# Altium PCB Mixed Signal Board Project.PcbDoc (part 2 of 3)
Units mm, origin at the board's own origin, x right, y up, seen from the top; angles counter-clockwise.
Board outline 70.1 x 70.99 mm, 4 copper layers (Top Layer, GND, VCC, Bottom Layer), stack 1.565 mm thick; 188 components, 143 nets, 738 pads, 458 vias.
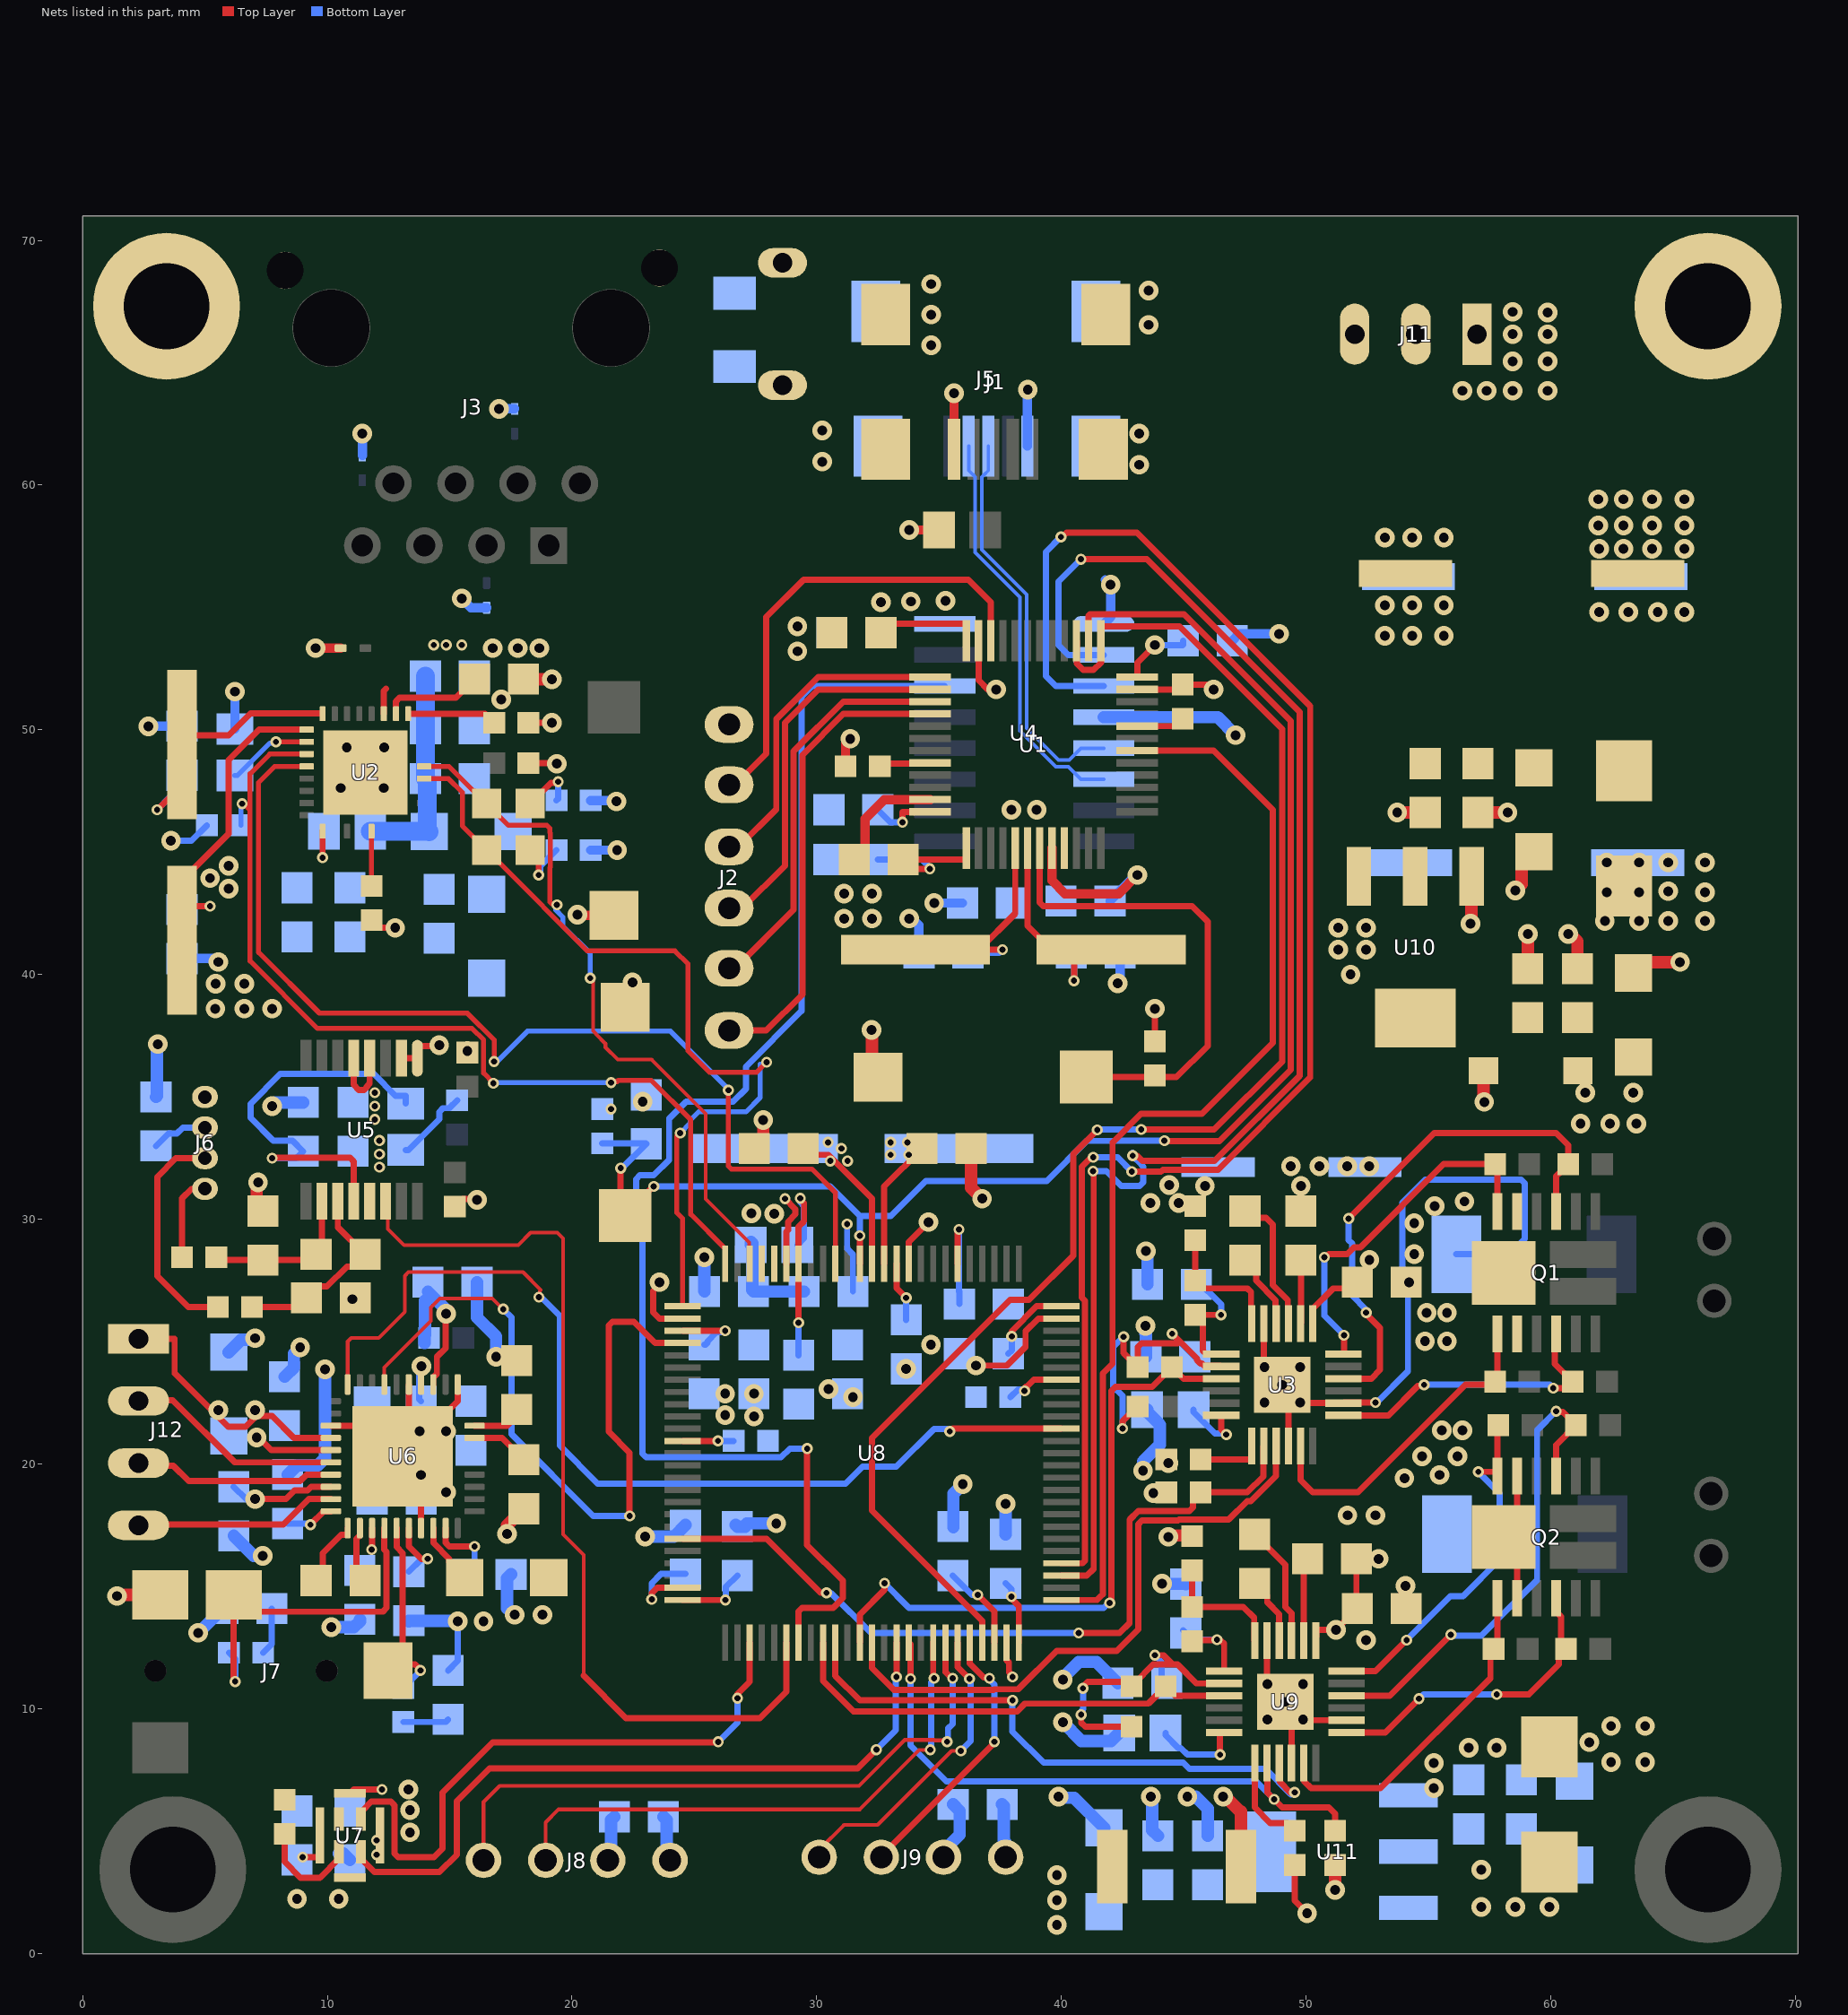
[diagram p4: the nets of this part, all layers, seen from the top]

## Via types
v1: diameter 0.8, hole 0.4, Top Layer to Bottom Layer, tented both sides, 280 vias
v2: diameter 0.45, hole 0.25, Top Layer to Bottom Layer, tented both sides, 178 vias

## Nets (pads, with @x,y where several pads share a name; then routed paths per layer and width w, separated by ;. In a path a pad name is that pad's centre, name@x,y a point inside that pad or via, vN(x,y) a via of type N, cw(c..) or ccw(c..) an arc to the next point about the centre after c; other vN are vias at no path point)
+1V8: C37.2 C38.2 C87.2 C88.2 C89.2 D8.K FB3.1 U6.34 U11.2 U11.4 | length 2.3
  Top Layer w0.254: U6.34@13.831,23.255 13.831,23.991 v1(13.843,24.003)
  Bottom Layer w0.254: C37.2@13.831,22.57 13.758,22.643 13.758,23.918 v1(13.843,24.003)
  other v1: 39.814,1.168 39.814,2.175 39.814,3.212
+3V3: C1.2 C2.2 C3.2 C4.2 C7.2 C8.2 C9.2 C16.2 C17.2 C18.2 C19.2 C28.2 C29.2 C31.2 C44.2 C45.2 C46.2 C47.2 C52.2 C53.2 C54.2 C55.2 C59.2 C60.2 C61.2 C62.2 C63.2 C64.2 C71.2 C78.2 C79.2 C83.2 D6.K FB1.1 FB2.1 FB4.1 J6.3 J8.3 J9.3 R2.2 R3.2 R5.2 R8.2 R9.2 R10.1 R21.1 R25.2 R26.2 R27.2 R32.2 R33.2 R35.2 R45.1 U1.1 U1.9 U1.24 U1.36 U1.48 U2.17 U4.4 U4.16 U5.13 U6.5 U6.8 U6.33 U7.1 U8.6 U8.11 U8.19 U8.28 U8.50 U8.75 U8.100 U10.2 U10.4 | length 88.2
  Top Layer w0.254: v1(7.048,18.57) 8.31,18.57 8.664,18.924 9.186,18.924 9.332,19.07 U6.8@10.146,19.07 ; v1(7.112,21.082) 7.193,21.082 7.704,20.57 U6.5@10.146,20.57 ; v2(9.804,44.78) 9.807,44.783 U2.17@9.807,45.86 ; R8.2@11.811,42.227 12.128,41.91 v1(12.774,41.91) v1@12.807,41.877 ; U6.33@14.331,23.255 14.331,23.546 14.477,23.692 14.477,24.384 14.831,24.738 14.831,26.116 v1@15.061,26.346 ; R25.2@15.215,30.518 15.529,30.832 16.08,30.832 v1(16.115,30.797) ; R5.2@18.218,48.641 19.355,48.641 v1(19.38,48.616) ; R9.2@18.218,50.292 v1(19.177,50.292) ; U8.50@24.52,14.447 v2(26.267,14.447) ; U8.28@24.52,25.447 v2(26.258,25.447) ; v2(29.258,25.781) 29.258,29.701 29.483,29.927 29.483,30.652 29.33,30.806 v2(29.33,30.859) ; C4.2@32.623,53.975 32.989,54.341 36.089,54.341 36.112,54.318 U1.36@36.112,53.641 ; U8.11@33.258,28.185 33.258,27.194 v2(33.655,26.797) ; v2(33.506,46.228) 33.506,46.637 33.514,46.645 34.616,46.645 U1.48@34.624,46.653 ; v2(34.624,44.323) 33.909,44.323 C3.2@33.528,44.704 36.089,44.704 36.112,44.727 U1.1@36.112,45.165 ; U8.6@35.758,28.185 35.758,29.483 35.813,29.538 v2(35.813,29.591) ; v2(37.953,14.587) 37.953,14.506 38.258,14.202 U8.75@38.258,12.709 ; v2(37.968,25.216) 37.968,25.426 38.989,26.447 U8.100@39.996,26.447 ; U1.24@43.1,52.153 43.1,52.752 v1(43.815,53.467) ; R2.2@43.815,37.275 v1(43.815,38.608) ; R45.1@49.53,3.62 49.53,2.159 v1(50.038,1.651)
  Top Layer w0.381: v1(33.782,58.166) R3.2@34.991,58.166
  Bottom Layer w0.254: C31.2@3,33 3.508,33.508 3.852,33.508 4.094,33.75 J6.3@5,33.75 ; v1(3.612,45.466) 4.445,45.466 R10.1@5.08,46.101 ; C44.2@6.177,19.07 6.677,18.57 v1(7.048,18.57) ; FB2.1@13.208,32.832 13.308,32.832 14.572,34.096 14.572,34.395 14.721,34.544 14.986,34.544 R26.2@15.304,34.862 ; C62.2@25.4,24.876 25.456,24.876 25.527,24.947 25.527,25.003 25.908,25.384 25.964,25.384 25.98,25.4 26.211,25.4 v2(26.258,25.447) ; v2(26.267,14.447) 26.293,14.473 26.293,14.982 C61.2@26.758,15.447 ; FB4.1@29.208,28.956 29.48,29.228 29.48,30.548 29.33,30.698 v2(29.33,30.859) ; C63.2@29.258,24.447 29.258,25.447 v2(29.258,25.781) ; C2.2@32.496,44.704 34.29,44.704 34.624,44.37 v2(34.624,44.323) ; C1.2@32.496,46.736 33.004,46.228 v2(33.506,46.228) ; C28.2@32.623,53.975 32.979,54.331 U4.16@35.231,54.331 ; C64.2@33.655,25.892 v2(33.655,26.797) ; v2(35.813,29.591) 35.813,27.051 35.83,27.051 C71.2@35.83,26.543 ; C60.2@37.719,15.129 37.953,14.894 v2(37.953,14.587) ; C59.2@37.83,24.511 37.968,24.649 v2(37.968,25.216) ; v1(43.815,53.467) 44.958,53.467 44.974,53.483 C9.2@44.974,53.641
  Bottom Layer w0.508: R32.2@13.97,24.956 13.97,25.257 13.986,25.273 13.986,26.67 ; C47.2@14.11,27.051 14.859,26.302 v1(14.859,26.144) ; J8.3@21.463,3.81 21.598,3.945 21.598,5.453 C54.2@21.733,5.588 ; J9.3@35.179,3.937 35.179,4.192 35.839,4.852 35.839,5.833 C55.2@35.576,6.096 ; U4.4@41.731,50.521 46.38,50.521 v1(47.117,49.784)
  other v1: 13.379,4.953 13.379,5.867 13.31,6.706 44.369,20.041 5.542,22.205 7.048,22.205 61.214,33.909 62.42,33.909 63.5,33.909 61.404,35.179 63.368,35.179 15.723,36.881 5.969,43.511 5.207,43.942 5.969,44.45 37.957,46.736 38.989,46.736 32.623,55.217 33.846,55.245 35.259,55.275
  other v2: 12.128,32.131 12.128,32.667 12.128,33.22 21.596,34.506
+12V: C23.2 C24.1 C25.2 C73.2 C75.2 C80.1 C81.1 C82.1 D5.A D7.A J11.1 Q1.2 Q1.11 Q1.15 Q2.2 Q2.11 Q2.15 U3.1 U9.1 | length 14
  Top Layer w0.254: U3.1@50.272,25.741 50.272,26.341 51.109,27.178 51.832,27.178 52.584,27.93 v1(52.584,28.344) ; U9.1@50.399,12.787 50.399,12.934 50.419,12.954 50.419,13.227 50.422,13.23 v1(51.219,13.23) C75.2@52.086,14.097 52.054,14.129 C73.2@52.054,16.129 ; Q2.2@58.617,14.518 58.617,16.468 Q2.15@58.067,17.018 58.617,17.568 Q2.11@58.617,19.518
  other v1: 62.46,7.823 63.85,7.823 61.571,8.636 62.46,9.296 63.85,9.296 52.451,12.81 52.958,16.129 51.689,17.907 52.832,17.907 54.856,25.019 55.753,25.019 54.927,26.187 55.753,26.187 49.784,31.369 49.376,32.172 50.546,32.172 51.673,32.172 52.578,32.172 62.205,42.189 63.602,42.189 64.795,42.189 66.294,42.189 63.602,43.358 62.281,43.37 66.294,43.37 64.795,43.409 62.281,44.582 63.602,44.582 64.795,44.582 66.294,44.582 61.976,54.813 63.17,54.813 64.364,54.813 65.456,54.813 61.976,57.404 62.97,57.404 64.135,57.404 65.456,57.404 61.933,58.349 62.97,58.349 64.135,58.349 65.456,58.349 61.933,59.421 62.97,59.421 64.135,59.421 65.456,59.421 56.383,63.856 57.379,63.856 58.433,63.856 59.868,63.856 58.433,65.062 59.868,65.062 58.433,66.167 59.868,66.167 59.868,67.056 58.433,67.081
AIN0: J6.2 R28.2 | length 9.3
  Top Layer w0.254: J6.2@5,32.5 3.81,32.5 3.048,31.738 3.048,27.686 4.318,26.416 R28.2@5.524,26.416
AIN1: J6.1 R29.2 | length 3.5
  Top Layer w0.254: R29.2@4.064,28.448 4.064,30.861 4.445,31.242 4.992,31.242 J6.1@5,31.25
CAN_RX: J9.1 U8.70 | length 12.6
  Top Layer w0.152: J9.1@30.099,3.937 30.099,4.242 31.115,5.258 32.487,5.258 35.509,8.28 v2(35.89,8.28)
  Top Layer w0.254: U8.70@35.758,12.709 35.758,11.712 v2(36.24,11.231)
  Bottom Layer w0.254: v2(35.89,8.28) 36.296,8.686 36.296,11.175 v2(36.24,11.231)
CAN_TX: J9.2 U8.71 | length 11.2
  Top Layer w0.254: J9.2@32.639,3.937 32.639,3.986 37.258,8.605 v2(37.258,8.655) ; U8.71@36.258,12.709 36.258,11.854 36.824,11.288 37.021,11.288 v2(37.059,11.251)
  Bottom Layer w0.254: v2(37.059,11.251) 37.059,11.198 37.258,10.998 v2(37.258,8.655)
CH340_RST: U4.14 U8.57 | length 58.3
  Top Layer w0.254: U8.57@29.258,12.709 29.258,13.981 29.407,14.13 30.672,14.13 31.063,14.521 31.063,15.241 29.607,16.697 v2(29.607,20.634)
  Bottom Layer w0.254: v2@29.566,20.599 29.531,20.634 28.903,20.634 28.543,20.274 26.067,20.274 26.064,20.277 23.034,20.277 22.885,20.426 22.885,29.843 22.62,30.109 22.62,31.643 22.775,31.797 23.341,31.797 23.968,32.424 23.968,34.119 24.663,34.814 26.585,34.814 27.102,35.331 27.102,36.246 29.362,38.506 29.378,38.506 29.378,51.349 29.82,51.791 U4.14@35.231,51.791
CH340_RXD: U4.3 U8.79 | length 65.3
  Top Layer w0.254: v2(39.98,57.887) 40.033,57.887 40.209,58.063 43.079,58.063 46.179,54.962 50.165,50.976 50.165,35.794 46.401,32.029 44.141,32.029 44.065,31.953 v2(42.875,31.953) ; U8.79@39.996,15.947 40.857,15.947 40.962,16.052 40.962,26.669 40.835,26.795 40.835,32.158 41.215,32.537 v2(41.3,32.537)
  Bottom Layer w0.254: v2(39.98,57.887) 39.37,57.277 39.37,52.194 39.773,51.791 U4.3@41.731,51.791 ; v2(41.3,32.537) 42.291,32.537 v2(42.875,31.953)
CH340_TXDPort: U4.2 U8.78 | length 62.7
  Top Layer w0.254: U8.78@39.996,15.447 41.04,15.447 41.318,15.725 41.318,31.941 v2(41.289,31.97) ; v2(40.799,56.972) 43.485,56.972 49.73,50.727 49.73,35.862 46.253,32.385 43.299,32.385 43.082,32.602 v2(42.912,32.602)
  Bottom Layer w0.254: v2(40.799,56.972) 39.886,56.059 39.886,53.46 40.284,53.061 U4.2@41.731,53.061 ; v2(41.289,31.97) 41.842,31.97 42.443,31.369 43.191,31.369 43.339,31.518 43.339,32.156 43.272,32.223 43.272,32.242 v2(42.912,32.602) 43.029,32.602 43.195,32.436 v2@42.903,32.728
CH340USB_D_N: J5.2 U4.6 | length 16.7
  Bottom Layer w0.146: J5.2@36.212,61.595 36.212,60.595 J5.2@36.389,60.418 ; J5.2@36.39,60.418 36.476,60.332 36.476,57.246 38.305,55.416 38.305,49.963 39.773,48.495 40.284,48.495 40.799,47.981 U4.6@41.731,47.981
CH340USB_D_P: J5.3 U4.5 | length 16.3
  Bottom Layer w0.146: J5.3@36.834,60.418 36.748,60.332 36.748,57.359 38.578,55.529 38.578,50.076 39.886,48.768 40.315,48.768 40.799,49.251 U4.5@41.731,49.251 ; J5.3@36.835,60.418 37.012,60.595 J5.3@37.012,61.595
CLK_MIC: U7.3 U8.65 | length 29.6
  Top Layer w0.254: U7.3@11.372,4.151 11.372,3.876 11.921,3.327 14.58,3.327 15.291,4.039 15.291,6.223 16.637,7.569 31.674,7.569 v2(32.436,8.331) ; v2(33.258,11.305) U8.65@33.258,12.709
  Bottom Layer w0.254: v2(32.436,8.331) 33.236,9.132 33.236,11.283 v2(33.258,11.305)
COL: DS1.A U2.28 U8.26 | length 34.9
  Top Layer w0.203: U2.28@13.957,48.01 14.952,48.01 15.519,47.443 15.519,46.076 17.008,44.587 20.623,40.972 24.203,40.972 24.74,40.435 24.74,36.882 25.611,36.01 27.544,36.01 v2(27.955,36.421) ; v2(24.422,33.528) 24.401,33.528 24.282,33.409 24.282,30.271 24.52,30.034 U8.26@24.52,26.447
  Bottom Layer w0.203: v2(24.422,33.528) 24.423,33.53 24.43,33.53 24.826,33.926 24.826,34.043 25.175,34.392 27.102,34.392 27.686,34.976 27.686,36.341 27.807,36.341 27.888,36.421 v2(27.955,36.421)
CRS: DS2.A U2.29 U8.23 | length 28.3
  Top Layer w0.152: v2(20.743,39.858) 20.746,39.858 20.865,39.739 20.865,37.702 20.971,37.596 20.971,37.575 21.366,37.18 21.366,37.028 21.867,36.527 23.251,36.527 25.459,34.319 25.459,30.83 27.237,29.053 27.237,28.206 U8.23@27.258,28.185
  Top Layer w0.203: U2.29@13.957,48.51 14.97,48.51 15.991,47.488 16.012,47.488 17.399,46.101 18.971,46.101 19.09,45.982 19.09,45.807 19.117,45.78 19.117,44.39 19.09,44.363 19.09,42.972 19.162,42.9 19.336,42.9 v2(19.383,42.853)
  Bottom Layer w0.203: v2(19.383,42.853) 19.339,42.808 19.339,42.64 19.624,42.355 19.624,41.996 20.743,40.877 v2(20.743,39.858)
DOUT_MIC: U7.4 U8.53 | length 25
  Top Layer w0.254: U7.4@11.372,5.501 11.445,5.574 11.445,5.849 11.801,6.205 12.6,6.205 12.751,6.054 12.751,4.086 12.9,3.937 14.351,3.937 14.707,4.293 14.707,6.579 16.764,8.636 25.933,8.636 25.949,8.651 v2(25.971,8.651) ; v2(26.758,10.432) 26.758,10.61 27.258,11.11 U8.53@27.258,12.709
  Bottom Layer w0.254: v2(25.971,8.651) 26.758,9.438 v2(26.758,10.432)
DRDY: U5.14 U8.56 | length 38.6
  Top Layer w0.152: U5.14@12.379,30.734 12.477,30.636 12.477,29.611 13.139,28.95 17.802,28.95 18.307,29.455 19.395,29.455 19.631,29.219 19.631,17.126 20.474,16.283 20.474,11.352
  Top Layer w0.254: 20.474,11.352 22.203,9.623 27.677,9.623 28.758,10.704 U8.56@28.758,12.709
DVDD: C27.2 R23.2 R24.2 U3.8 | length 13.1
  Top Layer w0.254: v2(42.494,21.455) 42.494,21.756 42.923,22.184 R23.2@42.936,22.171 ; v2(42.541,25.197) 42.541,24.541 R24.2@43.116,23.966 43.116,24.791 43.265,24.94 44.749,24.94 44.749,25.098 ; v2(44.521,25.326) 44.749,25.098 ; U3.8@46.522,23.991 46.499,24.014 45.833,24.014 45.735,24.112 45.677,24.112 45.543,24.246 45.543,24.304 44.749,25.098
  Bottom Layer w0.254: v2(42.494,21.455) 42.494,22.784 42.113,23.165 42.113,24.79 42.52,25.197 v2(42.541,25.197) ; v2(44.521,25.326) 44.521,25.313 C27.2@45.45,24.384
DVDD_2: C77.2 R46.2 R47.2 U9.8 | length 12.3
  Top Layer w0.254: v2(40.805,9.761) 40.805,9.439 40.972,9.271 R46.2@42.862,9.271 ; v2@40.843,10.82 40.843,10.871 41.072,11.1 42.685,11.1 R47.2@42.862,10.922 ; R47.2@42.99,11.049 43.751,11.811 44.552,11.811 ; v2(43.815,12.192) 44.171,12.192 44.552,11.811 ; U9.8@46.649,11.037 45.518,11.037 44.744,11.811 44.552,11.811
  Bottom Layer w0.254: v2(40.805,9.761) 40.805,9.888 40.894,9.977 40.894,10.822 v2(40.876,10.839) ; v2(43.815,12.192) 44.091,11.916 44.091,11.265 C77.2@44.307,11.049
EARTH: C21.1 J11.2 MH1.1 MH4.1 R12.1
EN: R22.2 U3.14 U8.45 | length 31.9
  Top Layer w0.254: U8.45@24.52,16.947 27.96,16.947 30.17,14.738 v2(30.399,14.738) ; v2(40.707,13.097) 42.376,13.097 42.783,13.504 42.783,17.726 43.138,18.082 44.649,18.082 44.653,18.085 45.229,18.085 45.378,18.234 45.378,18.535 R22.2@45.687,18.844 47.597,18.844 48.249,19.496 48.249,20.714 U3.14@48.272,20.737
  Bottom Layer w0.254: v2(30.399,14.738) 30.581,14.738 32.222,13.097 v2(40.707,13.097)
EN_2: R48.2 U8.66 U9.14 | length 25
  Top Layer w0.254: U8.66@33.758,12.709 33.833,12.634 v2(33.833,11.227) ; U9.14@48.399,7.783 48.422,7.76 48.422,6.569 49.022,5.969 50.927,5.969 51.181,5.715 R48.2@51.181,5.017
  Bottom Layer w0.254: v2(33.833,11.227) 33.833,8.495 35.292,7.036 47.955,7.036 v2(48.692,6.299)
EXT_UART_RX: J8.1 U8.69 | length 26.7
  Top Layer w0.152: J8.1@16.383,3.81 16.383,6.198 17.043,6.858 31.726,6.858 33.599,8.731 34.796,8.731 34.815,8.712 35.269,8.712 v2(35.326,8.655)
  Top Layer w0.254: U8.69@35.258,12.709 35.258,12.024 35.268,12.015 35.268,11.497 35.514,11.251 v2(35.557,11.251)
  Bottom Layer w0.254: v2(35.326,8.655) 35.363,8.692 35.363,9.194 35.557,9.388 v2(35.557,11.251)
EXT_UART_TX: J8.2 U8.68 | length 23
  Top Layer w0.152: J8.2@18.923,3.81 18.923,5.359 19.456,5.893 31.761,5.893 34.188,8.32 34.632,8.32 v2(34.641,8.328)
  Top Layer w0.254: U8.68@34.758,12.709 34.758,11.344 34.798,11.304 v2(34.798,11.251)
  Bottom Layer w0.254: v2(34.641,8.328) 34.679,8.366 34.679,11.078 34.798,11.198 v2(34.798,11.251)
GH1: Q1.1 R15.1 U3.17 | length 13.4
  Top Layer w0.254: U3.17@49.772,20.737 49.772,19.344 50.272,18.844 52.118,18.844 56.515,23.241 57.595,23.241 57.817,23.463 Q1.1@57.817,25.313
GH1_2: Q2.1 R39.1 U9.17 | length 13.7
  Top Layer w0.254: U9.17@49.899,7.783 49.922,7.76 49.922,7.037 50.202,6.756 53.035,6.756 57.531,11.252 57.531,12.319 57.817,12.605 Q2.1@57.817,14.518
GH2: Q1.12 R16.2 U3.24 | length 14.8
  Top Layer w0.254: v2(50.746,28.448) 50.799,28.448 50.926,28.575 51.673,28.575 51.952,28.854 52.217,28.854 55.621,32.258 R16.2@57.721,32.258 57.817,32.162 Q1.12@57.817,30.313 ; U3.24@51.522,24.491 51.545,24.514 v2(51.545,25.263)
  Bottom Layer w0.254: v2(50.746,28.448) 50.746,26.062 v2(51.545,25.263)
GH2_2: Q2.12 R40.2 U9.24 | length 15
  Top Layer w0.254: U9.24@51.649,11.537 52.829,11.537 v2(54.102,12.81) ; v2(57.036,19.685) 57.744,19.685 Q2.12@57.817,19.612 ; Q2.12@57.817,19.518 Q2.12@57.817,19.612 ; R40.2@57.848,21.59 57.817,21.559 Q2.12@57.817,19.612
  Bottom Layer w0.254: v2(54.102,12.81) 55.897,14.605 56.414,14.605 57.912,16.103 57.912,18.796 57.036,19.672 v2(57.036,19.685)
GL1: Q1.4 R17.1 U3.19 | length 12.3
  Top Layer w0.254: U3.19@51.522,21.991 53.36,21.991 54.572,23.203 54.783,23.203 v2(54.821,23.241) ; v2(60.094,23.102) 60.63,23.102 R17.1@60.897,23.368 60.166,24.098 60.166,25.262 Q1.4@60.217,25.313
  Bottom Layer w0.254: v2(54.821,23.241) 59.955,23.241 v2(60.094,23.102)
GL1_2: Q2.4 R41.1 U9.19 | length 12.8
  Top Layer w0.254: U9.19@51.649,9.037 53.233,9.037 v2(54.61,10.414) ; v2(57.785,10.592) 59.105,10.592 60.329,11.816 60.329,12.157 R41.1@60.619,12.446 60.417,12.648 60.417,13.768 60.217,13.968 Q2.4@60.217,14.518
  Bottom Layer w0.254: v2(54.61,10.414) 54.788,10.592 v2(57.785,10.592)
GL2: Q1.9 R18.1 U3.22 | length 21.9
  Top Layer w0.254: U3.22@51.522,23.491 52.661,23.491 53.019,23.849 53.019,25.566 52.451,26.134 v2(52.451,26.187) ; v2(51.737,30.032) 55.233,33.528 60.217,33.528 60.706,33.039 R18.1@60.706,32.258 60.389,31.941 60.217,31.769 Q1.9@60.217,30.313
  Bottom Layer w0.254: v2(51.737,30.032) 51.737,29.154 51.876,29.016 51.876,26.889 52.451,26.314 v2(52.451,26.187)
GL2_2: Q2.9 R42.1 U9.22 | length 20.4
  Top Layer w0.254: U9.22@51.649,10.537 53.421,10.537 v2(55.915,13.031) ; Q2.9@60.217,19.518 60.217,20.783 R42.1@61.024,21.59 60.49,22.124 60.255,22.124 v2(60.217,22.162)
  Bottom Layer w0.254: v2(55.915,13.031) 55.952,12.993 57.164,12.993 59.436,15.266 59.436,21.381 v2(60.217,22.162)
GND: C1.1 C2.1 C3.1 C4.1 C5.1 C6.1 C7.1 C8.1 C9.1 C10.1 C11.1 C12.1 C13.1 C14.1 C15.1 C16.1 C17.1 C18.1 C19.1 C20.1 C24.2 C25.1 C26.1 C27.1 C28.1 C29.1 C30.1 C31.1 C33.1 C34.1 C35.2 C36.1 C37.1 C38.1 C39.2 C40.1 C41.1 C43.1 C44.1 C45.1 C46.1 C47.1 C48.2 C49.2 C50.2 C51.2 C52.1 C53.1 C54.1 C55.1 C56.2 C57.1 C58.2 C59.1 C60.1 C61.1 C62.1 C63.1 C64.1 C65.1 C66.1 C67.1 C68.1 C69.1 C70.1 C71.1 C75.1 C76.1 C77.1 C78.1 C79.1 C80.2 C81.2 C82.2 C83.1 C84.1 C85.1 C86.1 C87.1 C88.1 C89.1 C90.1 C91.1 C92.1 D1.A D2.A D3.A D4.A D6.A D8.A J1.5 J1.6 J2.6 J5.5 J5.6 J6.4 J7.1 J8.4 J9.4 J11.3 R1.1 R4.1 R6.1 R7.1 R11.1 R14.1 R19.1 R20.1 R22.1 R34.1 R36.2 R38.1 R43.1 R44.1 R48.1 SW1.1 SW2.1 SW3.1 U1.8 U1.23 U1.35 U1.47 U2.33 U3.5 U3.16 U3.20 U3.25 U4.1 U5.1 U5.2 U5.4 U5.5 U6.3 U6.17 U6.31 U6.35 U6.41 U7.5 U8.10 U8.20 U8.27 U8.74 U8.99 U9.5 U9.16 U9.20 U9.25 U10.1 U11.1 | length 206.4
  Top Layer w0.254: v2(8.992,3.937) 9.649,3.937 9.697,3.985 U7.5@9.697,4.826 ; U6.3@10.146,21.57 U6.41@11.831,21.57 ; U7.5@10.922,6.551 11.077,6.706 v2(12.231,6.706) ; U5.5@11.079,36.584 11.079,35.5 11.286,35.293 11.497,35.293 11.646,35.441 11.646,35.477 11.729,35.56 U5.4@11.729,36.584 ; U5.2@13.029,36.584 U5.1@13.679,36.584 13.679,36.993 13.77,37.084 v1@14.605,37.084 ; U6.41@13.331,21.336 U6.35@13.331,23.255 ; U6.17@13.831,17.385 13.831,19.57 U6.41@13.081,20.32 15.331,22.57 U6.31@15.331,23.255 ; v1@23.512,27.432 23.512,27.259 23.323,27.071 23.323,26.192 23.569,25.947 U8.27@24.52,25.947 ; v2(28.702,30.845) 29.128,30.419 29.128,30.209 28.825,29.906 28.825,29.561 28.758,29.495 U8.20@28.758,28.185 ; U8.10@33.758,28.185 33.758,29.076 v1(34.569,29.888) ; v1(36.512,24.028) 37.768,24.028 38.532,24.791 38.532,25.426 39.053,25.947 U8.99@39.996,25.947 ; U1.35@36.612,53.641 36.612,52.034 36.993,51.653 v1(37.338,51.653) ; U8.74@37.758,12.709 37.758,11.991 37.854,11.895 37.854,11.502 37.998,11.358 v2(37.998,11.305) ; U1.23@43.1,51.653 44.76,51.653 R4.1@44.958,51.851 46.075,51.851 46.224,51.703 v1(46.224,51.653) ; U3.5@48.272,25.741 48.272,23.991 v1(48.297,23.966) v1(49.022,23.241) U3.25@49.272,22.991 ; U9.5@48.399,12.787 48.399,11.037 v1(48.424,11.012) ; U9.25@48.424,10.537 48.899,10.537 v1(49.149,10.287) U9.25@49.399,10.037 ; U3.16@49.272,20.737 U3.25@49.272,22.991 ; U9.16@49.399,7.783 U9.25@49.399,10.037 ; U9.20@51.649,9.537 49.899,9.537 v1(49.874,9.562) U9.25@49.399,10.037 ; v2(52.833,22.513) 52.83,22.516 51.547,22.516 U3.20@51.522,22.491 49.772,22.491 v1(49.747,22.516) U3.25@49.272,22.991
  Top Layer w0.381: v1(9.525,53.34) D1.A@10.544,53.34 ; v1@20.193,42.484 20.259,42.418 SW2.1@21.717,42.418 ; R1.1@31.179,48.514 31.179,49.447 v1(31.369,49.637) ; C3.1@31.528,44.704 31.973,45.148 31.973,46.368 32.758,47.153 U1.47@34.624,47.153 ; J1.5@35.611,61.468 v1(35.611,63.754) ; U1.8@39.612,45.165 39.612,43.845 40.15,43.307 42.338,43.307 v1(43.1,44.069)
  Top Layer w0.508: v1@1.397,14.657 J7.1@3.177,14.657 ; v1@7.112,31.496 7.112,30.591 C33.1@7.366,30.337 ; U6.41@11.831,21.57 U6.41@13.081,20.32 ; v1(16.897,24.388) 16.953,24.332 17.957,24.332 C49.2@18.034,24.255 ; v1(17.349,17.145) 17.349,17.492 C48.2@18.034,18.177 ; C10.1@18.015,52.07 v1(19.177,52.07) ; SW3.1@22.174,38.659 22.467,38.952 v1(22.467,39.683) ; C58.2@27.448,32.893 27.813,33.258 v1(27.813,34.063) ; v1@32.258,37.719 32.258,36.068 SW1.1@32.512,35.814 ; C56.2@36.306,32.893 36.306,31.297 v1(36.758,30.845) ; v1(43.755,18.82) 43.767,18.832 44.278,18.832 R22.1@44.29,18.844 ; v1(44.369,17.026) 44.425,17.082 45.212,17.082 R38.1@45.339,17.208 ; v1(46.609,6.407) 46.688,6.407 47.277,5.818 47.329,5.818 D8.A@47.329,3.556 ; v1@51.181,2.54 R48.1@51.181,3.62 ; v1(53.721,46.625) C86.1@54.864,46.625 ; C75.1@54.086,14.097 54.015,14.168 54.015,15.026 v1@54.102,15.113 ; U10.1@56.758,44.023 56.758,42.048 v1@56.769,42.037 ; C85.1@57.023,46.625 v1(58.229,46.625) ; D6.A@57.245,36.074 57.245,34.989 57.277,34.957 v1@57.277,34.925 ; v1(58.547,43.434) 58.806,43.693 58.806,44.514 C84.1@59.314,45.022 ; C78.1@59.055,40.243 v1(59.055,41.656) ; v1(60.706,41.656) 60.789,41.656 61.087,41.358 C79.1@61.087,40.243 ; C83.1@63.368,40.068 63.813,40.513 v1@65.151,40.513
  Bottom Layer w0.254: C35.2@14.935,11.566 15.331,11.962 v1(15.331,13.579) ; C14.1@15.875,52.324 16.002,52.197 C14.1@16.008,52.197 ; v2(31.242,29.806) 31.242,28.801 31.48,28.564 C68.1@31.48,27.051 ; C65.1@35.56,17.447 35.563,17.447 C65.1@35.585,17.424 ; v2(52.833,22.513) 52.836,22.516 52.885,22.516 54.16,23.791 54.16,27.388 v1(54.203,27.432) ; v1@53.927,27.432 53.927,30.686 54.864,31.623 58.779,31.623 58.928,31.474 58.928,29.21 58.293,28.575 R19.1@56.134,28.575
  Bottom Layer w0.381: v1@2.667,50.165 v1(2.683,50.149) C15.1@4.064,50.149 ; C20.1@4.064,40.656 5.395,40.656 v1@5.538,40.513 ; R11.1@6.223,50.033 v1(6.223,51.562) ; D2.A@11.43,61.211 v1(11.43,62.103) ; v1(15.494,55.372) 15.875,54.991 D3.A@16.51,54.991 ; v1(17.018,63.119) 17.647,63.119 D4.A@17.653,63.113 ; R6.1@20.764,45.085 v1(21.844,45.085) ; R7.1@20.764,47.117 v1@21.844,47.117 ; v1(33.782,42.291) 33.909,42.291 34.179,42.021 C5.1@34.179,40.894 ; v1(34.798,42.926) C7.1@35.957,42.926 ; v1@38.608,63.881 38.612,63.877 J5.5@38.612,61.595 ; U4.1@41.731,54.331 42.012,54.612 v1(42.012,55.931) 41.986,55.931 v1@41.783,56.134 ; C8.1@41.985,43.006 43.048,44.069 v1(43.1,44.069) ; v1@42.291,39.624 42.402,39.735 C6.1@42.402,40.894 ; C9.1@46.974,53.641 47.257,53.924 v1(48.895,53.924)
  Bottom Layer w0.508: C31.1@3,35 3.037,35.037 3.037,37.123 v1(3.073,37.16) ; v1(4.724,13.106) 4.826,13.208 4.842,13.208 C39.2@5.731,14.097 ; C45.1@5.974,24.574 6.482,25.082 6.921,25.082 6.985,25.146 v1(7.048,25.146) ; C44.1@6.177,17.07 6.991,16.256 v1(7.366,16.256) ; v1(7.747,34.629) 7.885,34.767 9.002,34.767 C30.1@9.017,34.782 ; C46.1@8.255,23.57 8.636,23.951 8.636,24.511 v1(8.89,24.765) ; C43.1@8.382,19.57 8.763,19.951 9.608,19.951 9.906,20.248 v1(9.906,23.876) ; v1(10.16,13.335) 11.087,13.335 11.331,13.579 C41.1@11.331,13.657 ; C53.1@10.465,4.089 10.659,4.089 C53.1@10.922,3.826 ; C40.1@13.331,13.579 C40.1@13.335,13.583 ; C40.1@13.335,13.605 C40.1@13.335,13.583 ; v1(15.331,13.579) 15.318,13.592 13.344,13.592 C40.1@13.335,13.583 ; C47.1@16.115,27.432 16.115,25.988 16.897,25.206 v1(16.897,24.388) ; v1@17.349,14.097 17.349,15.333 C51.2@17.51,15.494 ; v1(22.987,17.043) 24.171,17.043 C66.1@24.638,17.51 ; C54.1@23.733,5.588 23.868,5.453 23.868,3.945 J8.4@24.003,3.81 ; v1(25.4,28.448) 25.4,27.067 C67.1@25.416,27.051 ; C61.1@26.695,17.51 C61.1@26.758,17.447 27.074,17.447 27.102,17.475 27.102,17.54 27.139,17.577 v1(28.346,17.577) ; C65.1@35.585,17.424 35.585,18.798 v1(35.969,19.182) ; C55.1@37.576,6.096 37.647,6.025 J9.4@37.647,4.524 ; J9.4@37.719,3.937 37.647,4.009 37.719,4.08 J9.4@37.719,4.524 ; C60.1@37.719,17.129 v1(37.719,18.372) ; v1@39.936,6.407 v1(39.882,6.407) 39.925,6.365 40.515,6.365 C89.1@41.742,5.139 ; v1(40.056,9.449) 40.819,8.686 42.026,8.686 R44.1@42.357,9.017 ; v1@40.056,11.265 40.707,11.916 41.44,11.916 C77.1@42.307,11.049 ; v1(43.332,19.736) 43.332,20.109 44.015,20.791 44.015,21.61 43.5,22.125 R20.1@43.5,22.225 ; v1(43.434,25.654) 43.434,25.329 43.45,25.313 C27.1@43.45,24.384 ; v1(43.45,28.702) 43.514,28.639 C26.1@43.514,27.344 ; v1(43.658,6.407) 43.714,6.351 43.714,5.038 C88.1@43.942,4.81 ; v1(44.109,15.113) 44.117,15.105 45.077,15.105 C76.1@45.085,15.097 ; v1(45.146,6.407) 45.482,6.407 45.974,5.915 C87.1@45.974,4.81
  other v1: 8.763,2.234 10.465,2.234 51.181,2.603 55.22,6.756 55.22,7.783 56.642,8.407 57.785,8.407 48.424,9.562 49.874,11.012 40.056,11.198 16.383,13.579 17.653,13.843 18.796,13.843 1.406,14.61 54.055,15.026 14.859,18.849 54.015,19.426 13.831,19.558 55.452,19.558 54.737,20.32 56.19,20.32 13.779,21.336 14.859,21.336 55.547,21.381 56.388,21.381 27.432,21.947 26.258,21.998 48.297,22.516 31.48,22.733 26.258,22.876 27.432,22.876 30.48,23.063 33.655,23.892 49.747,23.966 34.668,24.876 11.02,26.74 23.569,27.432 54.416,28.575 54.416,29.845 55.246,30.543 43.641,30.672 44.784,30.672 56.468,30.734 45.863,31.369 44.403,31.401 7.17,31.514 57.277,34.798 22.887,34.814 14.572,37.117 32.242,37.743 5.425,38.608 6.604,38.608 7.747,38.608 5.441,39.624 6.604,39.624 42.294,39.649 51.816,40.005 5.541,40.515 65.278,40.513 51.308,41.021 52.451,41.021 51.308,41.91 52.451,41.91 56.718,42.083 31.115,42.291 32.258,42.291 20.226,42.451 31.115,43.307 32.258,43.307 21.81,47.076 10.541,47.625 12.307,47.625 10.795,49.276 12.319,49.276 17.111,51.238 29.21,53.213 16.764,53.34 17.78,53.34 18.667,53.34 53.213,53.848 54.331,53.848 55.626,53.848 29.21,54.229 53.213,55.093 54.331,55.093 55.626,55.093 53.213,57.861 54.331,57.861 55.626,57.861 43.18,60.833 30.226,60.96 43.18,62.103 30.226,62.23 38.623,63.905 34.671,65.718 43.561,66.548 34.671,66.968 43.561,67.945 34.671,68.218
  other v2: 12.014,4.039 12.014,4.623 11.938,34.082 11.938,34.629 11.938,35.176
INT: R8.1 U2.21 | length 2.2
  Top Layer w0.203: U2.21@11.807,45.86 11.807,43.628 R8.1@11.811,43.624
JTCK/SWCLK_F103: J2.4 U1.37 | length 13.2
  Top Layer w0.254: J2.4@26.416,45.219 26.804,45.219 28.346,46.761 28.346,50.444 30.055,52.153 U1.37@34.624,52.153
JTCLK_F407: U1.18 U8.76 | length 44.7
  Top Layer w0.254: U8.76@39.996,14.447 41.456,14.447 41.604,14.596 41.604,14.598 41.685,14.679 41.685,23.711 42.088,24.114 42.088,33.147 43.256,34.315 45.745,34.315 48.641,37.211 48.641,46.736 46.224,49.153 U1.18@43.1,49.153
JTDI_F103: J2.3 U1.38 | length 15.3
  Top Layer w0.254: J2.3@26.416,42.719 26.971,42.719 28.702,44.45 28.702,50.292 30.063,51.653 U1.38@34.624,51.653
JTDO_F103: J2.2 U1.39 | length 16.5
  Top Layer w0.254: J2.2@26.416,40.259 26.666,40.259 29.058,42.651 29.058,49.126 31.085,51.153 U1.39@34.624,51.153
JTMS/SWDIO_F103: J2.5 U1.34 | length 19.4
  Top Layer w0.254: J2.5@26.416,47.759 26.666,47.759 27.94,49.033 27.94,54.61 29.464,56.134 36.195,56.134 37.112,55.217 U1.34@37.112,53.641
JTMS_F407: U1.25 U1.27 U8.72 | length 62.1
  Top Layer w0.254: U8.72@36.758,12.709 36.758,13.593 32.258,18.093 32.258,21.071 37.897,26.71 38.673,26.71 40.48,28.516 40.48,32.664 41.465,33.649 v2(41.465,33.659) ; U1.27@40.612,53.641 40.635,53.618 40.635,52.71 40.894,52.451 41.311,52.451 41.612,52.752 U1.25@41.612,53.641 41.612,54.206 41.635,54.229 44.831,54.229 49.019,50.041 49.019,36.446 46.24,33.667 43.265,33.667 v2(43.257,33.675)
  Bottom Layer w0.254: v2(41.465,33.659) 41.473,33.667 43.249,33.667 v2(43.257,33.675)
LRCK: U6.40 U8.90 | length 40.9
  Top Layer w0.152: U6.40@10.831,23.255 10.831,25.005 10.98,25.154 12.098,25.154 13.168,26.224 13.168,27.693 13.317,27.841 17.995,27.841 18.723,27.113 18.681,27.071 18.681,26.861 v2(18.644,26.823)
  Top Layer w0.254: v2(35.436,21.332) 35.551,21.447 U8.90@39.996,21.447
  Bottom Layer w0.254: v2(18.644,26.823) 18.681,26.786 18.778,26.786 19.507,26.057 19.507,20.751 21.051,19.207 31.184,19.207 31.871,19.893 33.254,19.893 34.794,21.434 35.335,21.434 v2(35.436,21.332)
MCLK: U6.37 U8.29 | length 30.3
  Top Layer w0.152: U6.37@12.331,23.255 12.331,23.943 14.232,25.844 14.232,26.404 14.599,26.771 16.746,26.771 v2(17.187,26.331)
  Top Layer w0.254: v2(22.353,17.882) 22.353,20.464 21.498,21.318 21.498,25.66 21.647,25.809 22.537,25.809 23.399,24.947 U8.29@24.52,24.947
  Bottom Layer w0.254: v2(17.187,26.331) 17.526,25.992 17.526,21.224 20.867,17.882 v2(22.353,17.882)
MDC: U2.12 U8.16 | length 43.1
  Top Layer w0.203: U2.12@9.157,48.51 7.853,48.51 7.194,47.852 7.194,40.91 9.677,38.427 15.72,38.427 16.815,37.333 v2(16.815,36.449) ; v2(26.391,35.277) 26.391,32.174 26.51,32.055 29.803,32.055 30.758,31.099 U8.16@30.758,28.185
  Bottom Layer w0.203: v2(16.815,36.449) 16.937,36.449 18.182,37.694 24.018,37.694 26.38,35.331 26.38,35.288 v2(26.391,35.277)
MDIO: R10.2 U2.11 U8.25 | length 39.5
  Top Layer w0.203: v2(6.515,46.98) 6.581,46.98 6.825,46.736 6.841,46.736 ; U2.11@9.157,49.01 7.646,49.01 6.841,48.205 6.841,46.736 ; v2(16.784,35.56) 16.784,35.582 16.387,35.979 16.387,37.33 15.914,37.802 9.595,37.802 6.841,40.556 6.841,46.736 ; v2(21.596,35.585) 21.644,35.633 21.847,35.633 21.888,35.674 23.243,35.674 24.85,34.066 24.85,30.204 26.258,28.796 U8.25@26.258,28.185
  Bottom Layer w0.203: R10.2@6.477,46.101 6.477,46.965 v2@6.502,46.99 ; v2@16.942,35.611 16.967,35.585 v2(21.596,35.585)
NetC5_2: C5.2 U1.5 X1.2 | length 9.8
  Top Layer w0.254: X1.2@34.037,41.021 X1.2@36.639,41.021 ; v2(37.592,41.021) X1.2@36.639,41.021 ; U1.5@38.112,45.165 38.112,42.494 X1.2@36.639,41.021
  Bottom Layer w0.254: C5.2@36.179,40.894 37.465,40.894 v2(37.592,41.021)
NetC6_2: C6.2 U1.6 X1.1 | length 8.1
  Top Layer w0.254: U1.6@38.612,45.165 38.612,41.998 39.589,41.021 40.513,41.021 40.612,41.021 40.513,40.922 v2(40.513,39.751)
  Bottom Layer w0.254: C6.2@40.402,40.894 40.513,40.783 v2(40.513,39.751)
NetC10_2: C10.2 U2.2 | length 4.1
  Top Layer w0.254: U2.2@12.807,50.66 12.807,51.159 12.956,51.308 15.253,51.308 C10.2@16.015,52.07
NetC11_2: C11.2 C12.2 C13.2 C14.2 FB1.2 U2.3 | length 9.8
  Top Layer w0.254: U2.3@12.307,50.66 12.307,51.592 12.401,51.687
  Bottom Layer w0.762: FB1.2@11.757,45.86 11.766,45.851 14.017,45.851 C11.2@14.084,45.918 ; C14.2@14.008,52.197 C13.2@14.008,50.038 C12.2@14.008,48.006 14.084,47.93 C11.2@14.084,45.918 ; C11.2@14.16,45.842 C11.2@14.084,45.918
  other v2: 14.351,53.467 14.859,53.467 15.494,53.467
NetC15_2: C15.2 U2.8 Y1.2 | length 11.2
  Top Layer w0.254: v2(3.048,46.736) 4.064,47.752 Y1.2@4.064,49.403 4.445,49.784 5.969,49.784 6.858,50.673 9.805,50.673 9.807,50.671 U2.8@9.807,50.66
  Bottom Layer w0.254: v2(3.048,46.736) 3.612,47.3 3.612,47.697 C15.2@4.064,48.149
NetC20_2: C20.2 U2.9 Y1.1 | length 14.4
  Top Layer w0.254: Y1.1@4.064,41.403 Y1.1@4.064,42.326 ; v2(5.207,42.799) 4.537,42.799 Y1.1@4.064,42.326 ; U2.9@9.157,50.01 7.211,50.01 5.969,48.768 5.969,45.756 4.064,43.851 Y1.1@4.064,42.326
  Bottom Layer w0.254: C20.2@4.064,42.656 4.207,42.799 v2(5.207,42.799)
NetC21_2: C21.2 J3.9 J3.10 R12.2
NetC22_1: C22.1 U3.3 | length 5.7
  Top Layer w0.254: C22.1@47.498,30.337 47.774,30.061 48.365,30.061 48.641,29.786 48.641,27.311 49.249,26.703 49.249,25.764 U3.3@49.272,25.741
NetC22_2: C22.2 U3.4 | length 3.1
  Top Layer w0.254: C22.2@47.498,28.337 47.956,27.879 47.956,27.494 48.749,26.7 48.749,25.764 U3.4@48.772,25.741
NetC23_1: C23.1 U3.2 | length 2.6
  Top Layer w0.254: U3.2@49.772,25.741 49.784,25.753 C23.1@49.784,28.337
NetC26_2: C26.2 R13.2 U3.7 | length 5.7
  Top Layer w0.254: U3.7@46.522,24.491 45.922,24.491 45.783,24.629 45.783,25.781 R13.2@45.466,26.098 v2(46.522,26.098)
  Bottom Layer w0.254: C26.2@45.514,27.344 45.514,27.612 45.529,27.628 45.529,27.519 46.522,26.526 v2(46.522,26.098)
NetC30_2: C30.2 FB2.2 U5.12 | length 17.3
  Top Layer w0.254: v2(7.747,32.5) 7.759,32.512 10.93,32.512 11.079,32.363 U5.12@11.079,30.734
  Bottom Layer w0.254: v2(7.747,32.5) 8.735,32.5 C30.2@9.017,32.782 8.579,33.22 7.79,33.22 6.858,34.153 6.858,34.722 8.077,35.941 11.899,35.941 12.788,35.052 13.208,35.052 FB2.2@13.208,34.732
NetC32_1: C32.1 C33.2 R29.1 U5.10 | length 6.5
  Top Layer w0.254: R29.1@5.461,28.448 5.572,28.337 C33.2@7.366,28.337 9.414,28.337 9.541,28.464 C32.1@9.541,28.575 9.779,28.813 U5.10@9.779,30.734
NetC32_2: C32.2 C34.2 R28.1 U5.11 | length 8.3
  Top Layer w0.254: R28.1@6.921,26.416 9.144,26.416 9.144,26.746 9.654,27.255 9.985,27.255 10.797,28.067 11.033,28.067 C32.2@11.541,28.575 10.429,29.687 U5.11@10.429,30.734
NetC35_1: C35.1 R31.2 | length 1.9
  Bottom Layer w0.254: R31.2@13.106,9.461 14.83,9.461 C35.1@14.935,9.566
NetC36_2: C36.2 C40.2 C41.2 FB3.2 U6.13 U6.16 | length 3.6
  Top Layer w0.254: v2(11.811,16.507) 11.831,16.527 U6.13@11.831,17.385 ; U6.16@13.331,17.385 13.331,16.638 13.84,16.129 v2(14.097,16.129)
  Bottom Layer w0.254: C40.2@13.335,15.605 13.843,16.113 14.081,16.113 v2(14.097,16.129)
NetC39_1: C39.1 R30.2 | length 1.9
  Bottom Layer w0.254: R30.2@7.379,12.294 7.731,12.646 C39.1@7.731,14.097
NetC42_1: C42.1 U6.11 | length 2.6
  Top Layer w0.254: C42.1@9.541,15.494 9.807,15.76 9.807,16.361 10.559,17.113 10.829,17.113 10.831,17.115 U6.11@10.831,17.385
NetC42_2: C42.2 U6.12 | length 2.2
  Top Layer w0.254: U6.12@11.331,17.385 11.331,17.094 11.183,16.946 11.183,15.748 11.437,15.494 C42.2@11.541,15.494
NetC43_2: C43.2 U6.10 | length 2
  Top Layer w0.254: v2(9.311,17.526) 9.855,18.07 U6.10@10.146,18.07
  Bottom Layer w0.254: C43.2@8.382,17.57 9.267,17.57 v2(9.311,17.526)
NetC48_1: C48.1 U6.27 | length 2.4
  Top Layer w0.254: U6.27@16.016,21.07 17.141,21.07 17.526,20.685 C48.1@18.034,20.177
NetC49_1: C49.1 U6.28 | length 2.3
  Top Layer w0.254: U6.28@16.016,21.57 17.349,21.57 C49.1@18.034,22.255
NetC50_1: C50.1 U6.18 | length 2.6
  Top Layer w0.254: U6.18@14.331,17.385 14.333,17.383 14.333,16.779 14.986,16.126 14.986,16.002 C50.1@15.621,15.367
NetC51_1: C51.1 U6.19 | length 3.2
  Top Layer w0.254: U6.19@14.831,17.385 14.833,17.383 14.833,16.791 14.986,16.638 v2(16.016,16.638)
  Bottom Layer w0.254: C51.1@15.51,15.494 16.016,16 v2(16.016,16.638)
NetC56_1: C56.1 U8.12 X2.2 | length 5.3
  Top Layer w0.254: U8.12@32.758,28.185 32.758,31.345 C56.1@34.306,32.893
  other v2: 33.02,32.639 33.758,32.639 33.02,33.147 33.709,33.147
NetC58_1: C58.1 U8.13 X2.1 | length 6.3
  Top Layer w0.254: C58.1@29.448,32.893 29.702,32.639 30.464,32.639 32.258,30.845 U8.13@32.258,28.185
  other v2: 30.556,32.385 31.258,32.385 31.007,32.896 30.464,33.147
NetC65_2: C65.2 U8.73 | length 3.6
  Top Layer w0.254: v2(36.576,14.656) 37.258,13.974 U8.73@37.258,12.709
  Bottom Layer w0.254: C65.2@35.56,15.447 36.351,14.656 v2(36.576,14.656)
NetC66_2: C66.2 U8.49 | length 3.8
  Top Layer w0.254: v2(23.258,14.473) 23.258,14.729 23.476,14.947 U8.49@24.52,14.947
  Bottom Layer w0.254: v2(23.258,14.473) 23.258,15.13 23.638,15.51 C66.2@24.638,15.51
NetC67_2: C67.2 C68.2 C69.2 C70.2 FB4.2 U8.21 U8.22 | length 4.3
  Bottom Layer w0.508: FB4.2@27.305,29.083 FB4.2@27.308,29.08 ; FB4.2@27.308,28.956 FB4.2@27.308,29.08 ; C67.2@27.416,27.051 27.362,27.105 27.362,29.026 FB4.2@27.308,29.08 ; C67.2@27.416,27.051 C68.2@29.48,27.051
  other v1: 28.258,30.226 27.325,30.246
NetC72_1: C72.1 U9.3 | length 5
  Top Layer w0.254: C72.1@47.899,17.129 49.149,15.879 49.149,14.16 49.399,13.91 U9.3@49.399,12.787
NetC72_2: C72.2 U9.4 | length 2.8
  Top Layer w0.254: C72.2@47.899,15.129 48.407,14.621 48.407,14.368 48.899,13.876 U9.4@48.899,12.787
NetC73_1: C73.1 U9.2 | length 3.4
  Top Layer w0.254: U9.2@49.899,12.787 49.899,15.974 C73.1@50.054,16.129
NetC76_2: C76.2 R37.2 U9.7 | length 4.1
  Top Layer w0.254: R37.2@45.339,12.763 45.386,12.81 46.5,12.81 46.649,12.661 U9.7@46.649,11.537
  Bottom Layer w0.254: C76.2@44.974,13.208 C76.2@45.085,13.097 45.355,12.827 v2(46.355,12.827)
NetC84_2: C84.2 C85.2 C86.2 D5.K U10.3
NetC90_2: C90.2 C91.2 C92.2 D7.K U11.3
  other v1: 57.15,1.905 58.547,1.905 59.944,1.905 57.15,3.429
NetDS1_K: DS1.K R6.2 | length 2.5
  Top Layer w0.254: DS1.K@18.288,45.085 18.636,44.737 v2(18.636,44.069)
  Bottom Layer w0.254: v2(18.636,44.069) 18.707,44.14 18.707,44.424 R6.2@19.367,45.085
NetDS2_K: DS2.K R7.2 | length 2.3
  Top Layer w0.254: DS2.K@18.288,46.99 19.139,47.841 19.393,47.841 v2(19.431,47.879)
  Bottom Layer w0.254: R7.2@19.367,47.117 19.431,47.181 v2(19.431,47.879)
NetJ7_2: J7.2 R31.1 U6.15 | length 8.4
  Top Layer w0.254: J7.2@12.477,11.557 J7.2@12.731,11.811 ; U6.15@12.831,17.385 12.831,16.611 13.081,16.361 13.081,12.161 J7.2@12.731,11.811 ; v2@13.84,11.557 13.586,11.811 J7.2@12.731,11.811
  Bottom Layer w0.254: R31.1@13.106,10.858 13.804,11.557 v2(13.804,11.572)
NetJ7_3: J7.3 R30.1 U6.14 | length 14.7
  Top Layer w0.254: v2@6.21,11.11 6.177,11.143 J7.3@6.177,14.657 6.864,13.97 12.272,13.97 12.421,14.119 12.421,16.418 12.331,16.507 U6.14@12.331,17.385
  Bottom Layer w0.254: R30.1@5.982,12.294 6.235,12.04 v2(6.235,11.115)
NetR1_2: R1.2 U1.44 | length 2.1
  Top Layer w0.254: R1.2@32.576,48.514 32.681,48.619 33.506,48.619 33.517,48.63 34.601,48.63 U1.44@34.624,48.653
NetR4_2: R4.2 U1.20 | length 2
  Top Layer w0.254: U1.20@43.1,50.153 44.657,50.153 R4.2@44.958,50.454
NetR9_1: R9.1 U2.1 | length 3.7
  Top Layer w0.254: U2.1@13.307,50.66 16.453,50.66 R9.1@16.821,50.292
NetR11_2: R11.2 U2.10 | length 3.5
  Top Layer w0.203: v2(7.901,49.51) U2.10@9.157,49.51
  Bottom Layer w0.203: R11.2@6.223,48.133 6.323,48.133 7.653,49.463 7.854,49.463 v2(7.901,49.51)
NetR13_1: R13.1 R14.2 U3.6 | length 5.4
  Top Layer w0.254: R14.2@45.466,29.146 R13.1@45.466,27.495 45.783,27.178 47.6,27.178 47.749,27.029 47.749,25.764 U3.6@47.772,25.741
NetR20_2: R20.2 U3.12 | length 2.7
  Top Layer w0.254: U3.12@46.522,21.991 46.522,21.423 v2(46.736,21.209)
  Bottom Layer w0.254: R20.2@45.4,22.225 45.4,22.125 46.278,21.247 46.698,21.247 v2(46.736,21.209)
NetR21_2: R21.2 U3.13 | length 2.6
  Top Layer w0.254: R21.2@45.687,20.193 47.749,20.193 47.772,20.216 U3.13@47.772,20.741
NetR33_1: R33.1 U7.2 | length 4.2
  Top Layer w0.254: R33.1@8.255,4.89 8.255,3.749 8.903,3.101 9.697,3.101 10.472,3.876 U7.2@10.472,4.151
NetR34_2: R34.2 U8.37 | length 2.1
  Top Layer w0.254: U8.37@24.52,20.947 v2(25.964,20.947)
  Bottom Layer w0.254: v2(25.964,20.947) R34.2@26.606,20.947
NetR36_1: R36.1 U8.94 | length 2.4
  Top Layer w0.254: v2@38.532,23.158 38.585,23.158 38.874,23.447 U8.94@39.996,23.447
  Bottom Layer w0.254: R36.1@37.909,22.733 38.227,23.05 38.372,23.05 38.334,23.012 38.357,22.989 v2(38.491,22.989)
NetR37_1: R37.1 R38.2 U9.6 | length 5.3
  Top Layer w0.254: R38.2@45.339,15.811 R37.1@45.339,14.16 47.435,14.16 47.876,13.719 47.876,12.81 U9.6@47.899,12.787
NetR44_2: R44.2 U9.12 | length 3.7
  Top Layer w0.254: v2(46.482,8.128) 46.482,9.014 46.505,9.037 U9.12@46.649,9.037
  Bottom Layer w0.254: R44.2@44.257,9.017 44.257,8.917 44.78,8.394 44.88,8.394 45.146,8.128 v2(46.482,8.128)
NetR45_2: R45.2 U9.13 | length 3.8
  Top Layer w0.254: U9.13@47.899,7.787 47.899,5.969 48.534,5.334 49.212,5.334 R45.2@49.53,5.017
nFAULT: R24.1 U3.9 U8.62 | length 26.3
  Top Layer w0.254: U8.62@31.758,12.709 31.758,13.851 32.773,14.867 v2(32.773,15.129) ; v2(41.974,14.326) 41.974,14.379 42.041,14.446 42.041,22.989 42.209,23.158 43.705,23.158 R24.1@44.513,23.966 44.988,23.491 U3.9@46.522,23.491
  Bottom Layer w0.254: v2(32.773,15.129) 33.769,14.133 41.73,14.133 41.923,14.326 v2(41.974,14.326)
nFAULT_2: R47.1 U8.59 U9.9 | length 19.1
  Top Layer w0.254: U8.59@30.258,12.709 30.258,11.134 31.499,9.893 38.186,9.893 38.507,10.214 43.552,10.214 R47.1@44.259,10.922 44.644,10.537 U9.9@46.649,10.537
NRST: R2.1 SW1.2 U1.7 | length 20
  Top Layer w0.254: U1.7@39.112,45.165 39.112,42.948 39.261,42.799 45.339,42.799 45.974,42.164 45.974,37.084 44.704,35.814 43.815,35.814 SW1.2@41.012,35.814
NTJRST_F103: J2.1 U1.40 | length 19.3
  Top Layer w0.254: J2.1@26.416,37.719 27.94,37.719 29.413,39.192 29.413,48.979 31.088,50.653 U1.40@34.624,50.653
NTRST_F407: C57.2 R35.1 SW3.2 U1.26 U8.14 | length 62.6
  Top Layer w0.254: v2(21.986,32.093) 21.986,30.871 22.225,30.632 22.597,30.632 23.309,31.344 v2(23.341,31.344) ; U8.14@31.758,28.185 v2(31.758,29.329) ; U1.26@41.112,53.641 41.112,54.663 41.169,54.72 45.011,54.72 49.374,50.356 49.374,36.116 46.457,33.198 v2@44.171,33.198
  Bottom Layer w0.254: R35.1@21.234,33.109 23.015,33.109 C57.2@23.038,33.087 22.044,32.093 v2(21.986,32.093) ; v2(23.341,31.344) 23.343,31.342 30.558,31.342 31.758,30.142 ; v2(31.758,29.329) 31.758,30.142 ; v2(44.208,33.213) 44.2,33.221 42.459,33.221 42.443,33.205 41.028,33.205 39.395,31.572 34.45,31.572 33.02,30.142 31.758,30.142
OUTA+: J12.1 U6.4 | length 10.8
  Top Layer w0.254: J12.1@2.286,25.121 2.29,25.124 3.761,25.124 3.761,23.709 5.95,21.52 6.661,21.52 7.106,21.965 7.739,21.965 8.634,21.07 U6.4@10.146,21.07 ; J12.1@2.921,25.146 J12.1@2.943,25.124
OUTA-: J12.2 U6.6 | length 8.9
  Top Layer w0.254: J12.2@2.286,22.606 3.683,22.606 6.219,20.07 U6.6@10.146,20.07
OUTB+: J12.3 U6.7 | length 8.3
  Top Layer w0.254: J12.3@2.286,20.041 2.395,19.931 3.706,19.931 4.333,19.304 8.89,19.304 9.156,19.57 U6.7@10.146,19.57
OUTB-: J12.4 U6.9 | length 8.3
  Top Layer w0.254: J12.4@2.286,17.526 8.2,17.526 9.244,18.57 U6.9@10.146,18.57
PH: U3.15 U8.63 | length 25.3
  Top Layer w0.254: U8.63@32.258,12.709 32.258,11.664 33.148,10.773 37.223,10.773 37.25,10.8 38.237,10.8 39.804,12.367 42.262,12.367 43.138,13.243 43.138,17.542 43.287,17.691 44.762,17.691 44.8,17.729 46.832,17.729 47.591,18.488 47.744,18.488 48.772,19.516 U3.15@48.772,20.737
PH_2: U8.60 U9.15 | length 24.3
  Top Layer w0.254: U8.60@30.758,12.709 30.758,11.348 31.76,10.347 v2(37.998,10.347) ; U9.15@48.899,7.783 48.922,7.76 48.922,7.011 49.349,6.584 v2(49.53,6.584)
  Bottom Layer w0.254: v2(37.998,10.347) 37.998,9.068 39.268,7.798 44.976,7.798 45.23,7.544 48.336,7.544 v2@49.378,6.502